# Altium PCB SAMD21_8X8_Layout.PcbDoc
Units mm, origin at the board's own origin, x right, y up, seen from the top; angles counter-clockwise.
Board outline 152.4 x 146.05 mm, 2 copper layers (Top Layer, Bottom Layer); 23 components, 31 nets, 146 pads, 53 vias.
Unrouted connection lines stored in the file: 27.
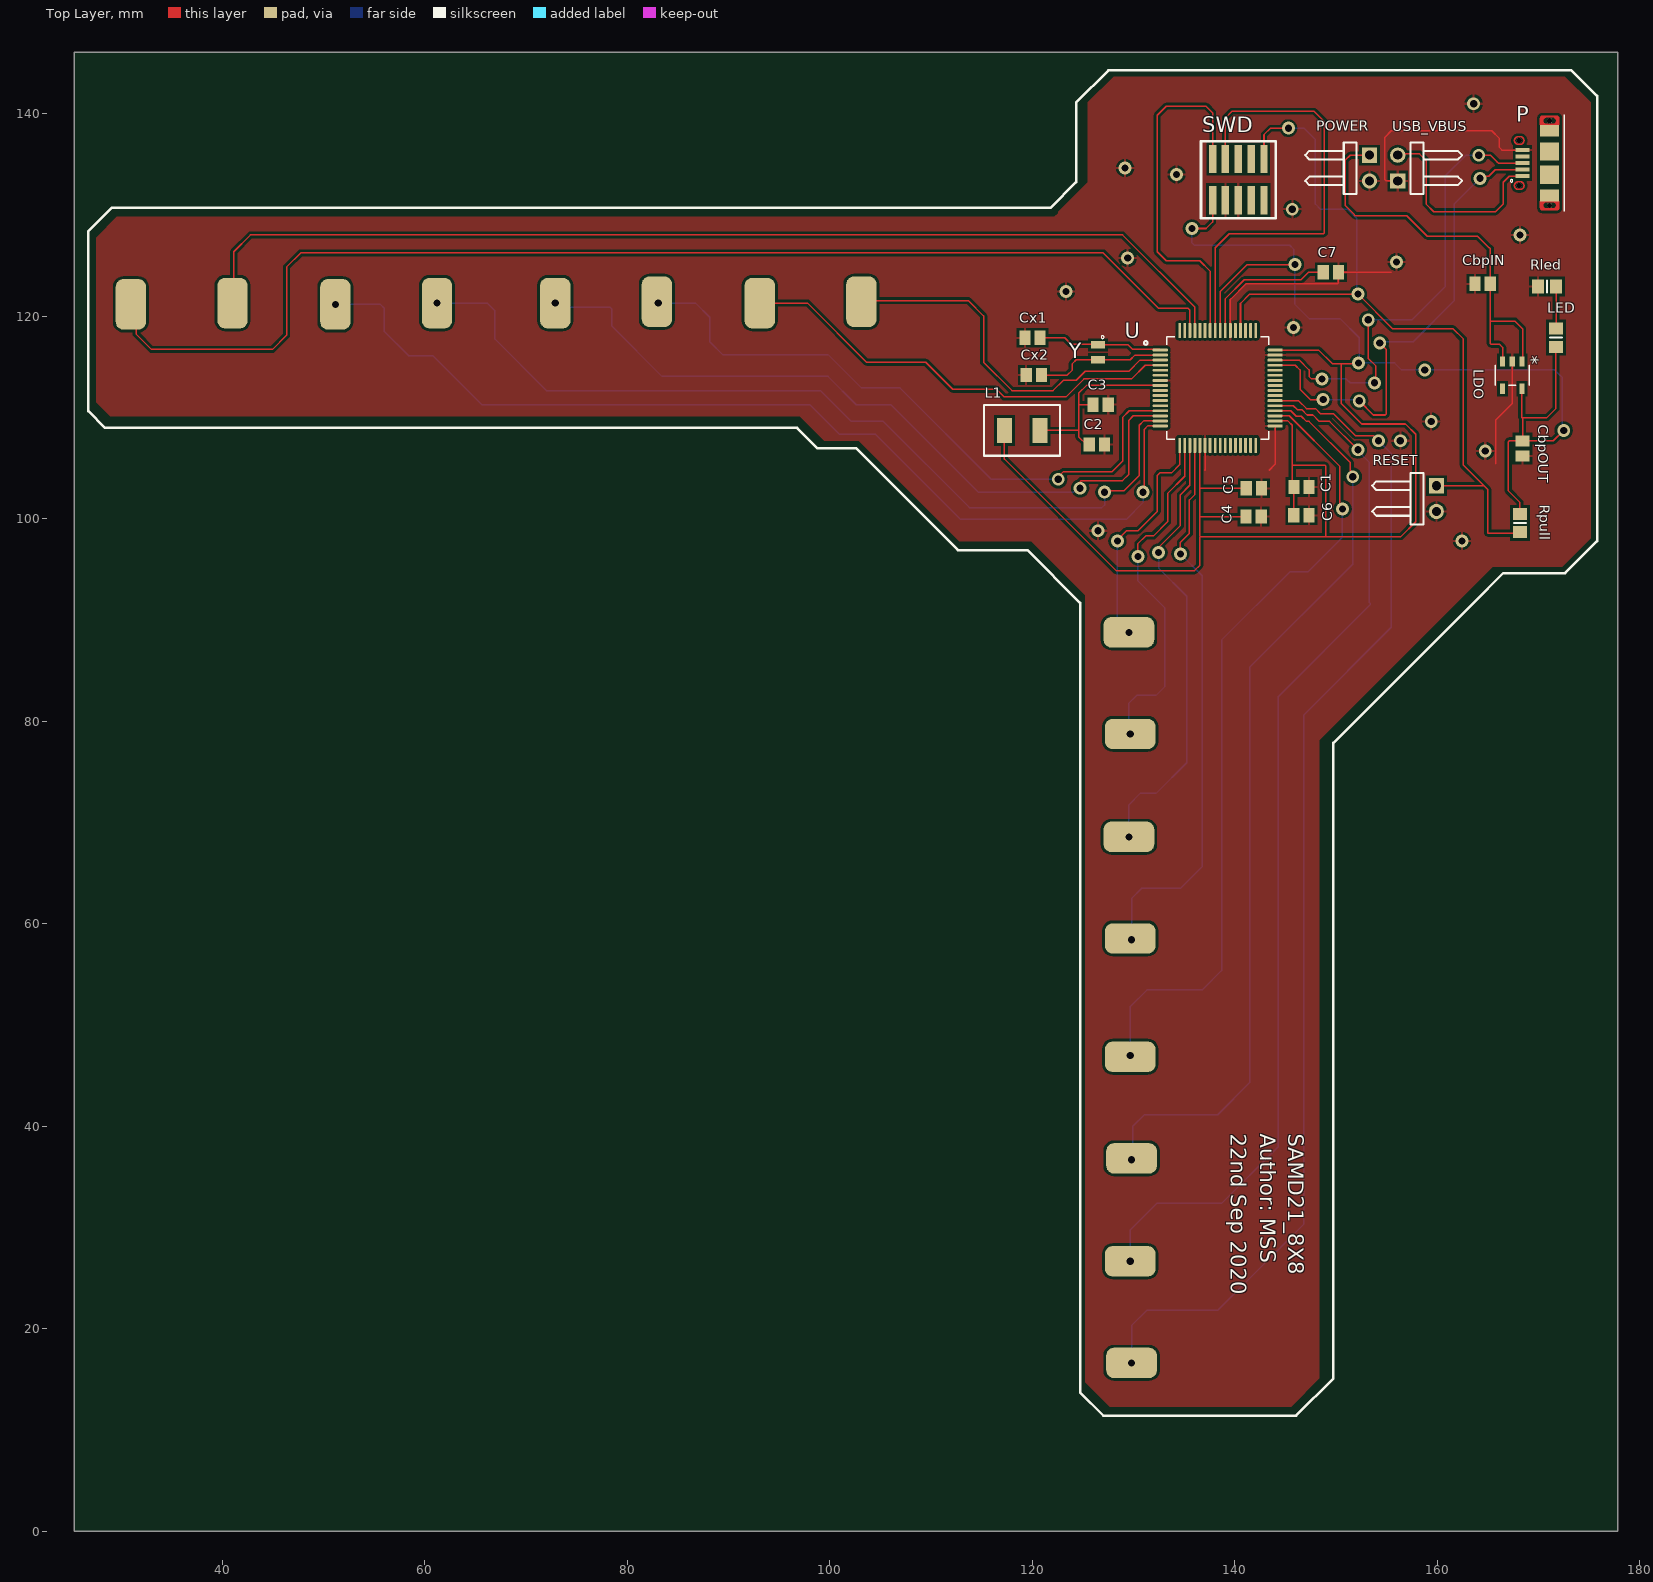
[diagram p0: Top Layer view]
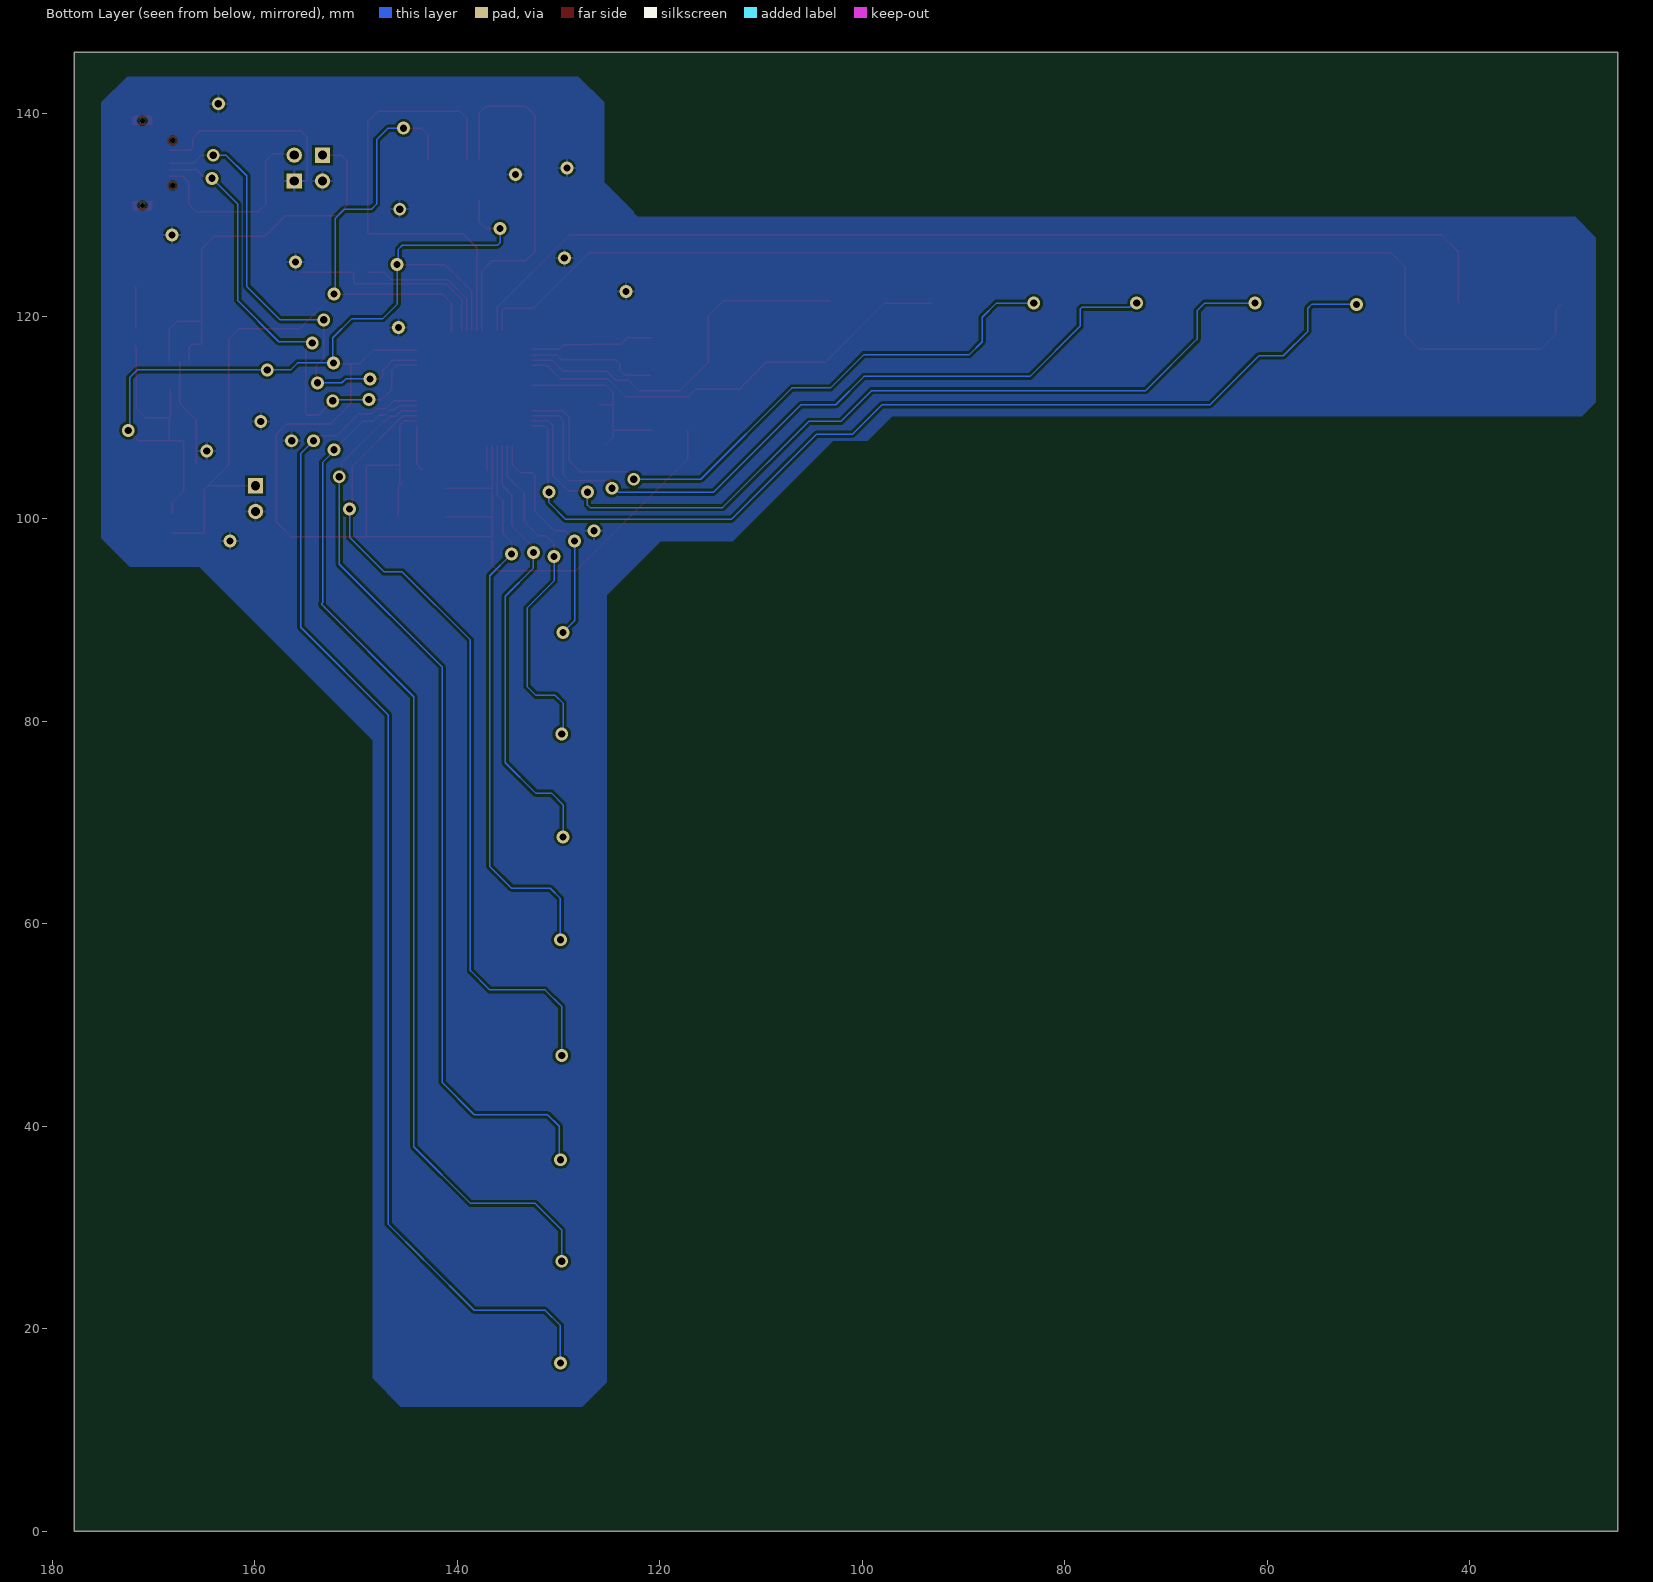
[diagram p1: Bottom Layer view, seen from below]

## Layer stack, top to bottom
Top Solder: solder mask 0.0102, Solder Resist, Dk 3.5
Top Layer: signal copper 0.0356
Dielectric 1: dielectric 0.32, FR-4, Dk 4.8
Bottom Layer: signal copper 0.0356
Bottom Solder: solder mask 0.0102, Solder Resist, Dk 3.5

## Board outline
25.4,0 177.8,0 177.8,146.05 25.4,146.05

## Design rules (kind name [scope] priority, off if disabled: settings)
Clearance [All] p1: gap=0.254 ignorepadtopadclearanceinfootprint=FALSE except(0: Arc-Hole Track-Hole SMDPad-Hole THPad-Hole Via-Hole Fill-Hole Poly-Hole Region-Hole Text-Hole)
PolygonConnect [All] p1: connectstyle=Relief reliefconductorwidth=0.254 reliefentries=4 polygonreliefangle="90 Angle" airgapwidth=0.254
RoomDefinition SAMD21_8X8_schematic [InComponentClass('SAMD21_8X8_schematic')] p1: confinementstyle=ConfineIn formatcopy=TRUE lockcomponents=FALSE outline 26.035,1.27 177.038,1.27 177.038,145.415 26.035,145.415
RoutingVias [All] p1: holewidth=0.711 width=1.27 viastyle="Through Hole" minholewidth=0.711 minwidth=1.27 maxholewidth=0.711 maxwidth=1.27
SolderMaskExpansion [All] p1: expansion=0.102 istentingtop=FALSE
Width [All] p1: maxlimit=0.254 minlimit=0.1 preferedwidth=0.254
30 further rules are at their usual default settings.

## Components (designator, comment, footprint, x,y, rotation, side; value= is the part's Value field where it differs from the comment)
C1 "Cap Pol3" C0805 146.57,103.124 r0 top value=10uF
C2 "Cap Pol3" C0805 126.365,107.315 r0 top value=100nF
C3 "Cap Pol3" C0805 126.746,111.252 r0 top value=10uF
C4 "Cap Pol3" C0805 141.847,100.203 r0 top value=100nF
C5 "Cap Pol3" C0805 141.871,102.997 r0 top value=100nF
C6 "Cap Pol3" C0805 146.558,100.33 r0 top value=100nF
C7 "Cap Pol3" C0805 149.479,124.333 r0 top value=1uF
CbpIN "Cap Pol3" C0805 164.465,123.19 r180 top value=1uF
CbpOUT "Cap Pol3" C0805 168.402,106.934 r270 top value=1uF
Cx1 "Cap Pol3" C0805 120.015,117.856 r180 top value=25pF
Cx2 "Cap Pol3" C0805 120.142,114.173 r180 top value=25pF
L1 "SRP4012TA-100M" Inductor 118.999,108.712 r180 top
LDO "AP2112K-3.3TRG1" SOT_RG1_DIO 167.386,114.173 r270 top
LED "Res Thermal" 6-0805_N 171.704,117.867 r90 top
P "0475890001" MOLEX_0475890001 171.077,135.113 r90 top
POWER "Header 2H" HDR1X2H 153.289,135.89 r270 top
RESET "Header 2H" HDR1X2H 159.893,103.251 r270 top
Rled "Res Thermal" 6-0805_N 170.815,122.936 r180 top
Rpull "Res Thermal" 6-0805_N 168.148,99.568 r270 top
SWD "FTSH-105-01-XXX-DV-K" FTSH-105-01-XXX-DV-K 140.335,133.477 r0 top
U "ATSAMD21J18A-AU" QFP80P1600X1600X120-64N 138.303,112.903 r0 top
USB_VBUS "Header 2H" HDR1X2H 156.083,133.35 r90 top
Y "ABS06-32.768KHZ-T" XTAL_ABS06-32.768KHZ-T 126.492,116.427 r270 top

## Footprints (in the part's own frame and the unit in brackets; to place one, negate y for a bottom-side part, rotate by r counter-clockwise, add the part's x,y. Pads: shape width x height; smd on the part's side, far side on the other; paste and mask are expansions set on the pad)
6-0805_N [mm] "Chip Resistor, Body 2.0x1.2mm, IPC Medium Density"
  rect 1.2x1.4 smd: 1(-0.9,0) 2(0.9,0)
  silkscreen extent 0,-0.6 0,0.6, body extent -1.07,-0.7 1.07,0.7, height 0.7
C0805 [mm] "Chip Capacitor, Body 2.0x1.3mm, IPC High Density"
  rect 1.1x1.4 smd: 1(-0.75,0) 2(0.75,0)
  body extent -1.1,-0.72 1.1,0.72, height 1.4
FTSH-105-01-XXX-DV-K [mil]
  rect 29x110 smd mask+2: 1(-100,-80) 2(-100,80) 3(-50,-80) 4(-50,80) 5(0,-80) 6(0,80) 7(50,-80) 8(50,80) 9(100,-80) 10(100,80)
  silkscreen extent -145,-150 145,150
HDR1X2H [mm] "Connector; Header; 2 Position; Right Angle"
  rect 1.5x1.5 hole 0.9: 1(0,0)
  round 1.5 hole 0.9: 2(2.54,0)
  silkscreen extent -1.27,-6.35 3.81,-1.27
Inductor [mm]
  rect 1.5x2.5 smd: 1(-1.75,0) 2(1.75,0)
  silkscreen extent -3.75,-2.5 3.75,2.5
MOLEX_0475890001 [mm]
  rect 0.4x1.35 smd: 1(-1.3,2.675) 2(-0.65,2.675) 3(0,2.675) 4(0.65,2.675) 5(1.3,2.675)
  rect 1.175x1.9 smd: 6(-3.187,0) 9(3.187,0)
  rect 1.8x1.9 smd: 7(-1.15,0) 8(1.15,0)
  round 0.5 hole 0.5 unplated: ""(-4.175,0) ""(-2.225,3) ""(2.225,3) ""(4.175,0)
  Top Layer region: 3.875,0.35 3.875,-0.35 3.875,-0.95 3.775,-0.95 3.775,0.95 3.875,0.95
  Top Layer region: 187 vertices and 0 holes, not listed, extent 3.875,-0.95 4.675,0.95
  Top Layer region: -3.775,-0.95 -3.875,-0.95 -3.875,-0.35 -3.875,0.35 -3.875,0.95 -3.775,0.95
  Top Layer region: 2.65,2.9 2.649,2.878 2.648,2.856 2.645,2.834 2.641,2.812 2.636,2.79 2.629,2.769 2.622,2.748 2.613,2.727 2.604,2.707 2.593,2.688 2.581,2.669 2.569,2.65 2.555,2.633 2.541,2.616 2.526,2.599 2.509,2.584 2.492,2.57 2.475,2.556 2.456,2.544 2.438,2.532 2.418,2.521 2.398,2.512 2.377,2.503 2.356,2.496 2.335,2.489 2.313,2.484 2.291,2.48 2.269,2.477 2.247,2.476 2.225,2.475 2.203,2.476 2.181,2.477 2.159,2.48 2.137,2.484 2.115,2.489 2.094,2.496 2.073,2.503 2.052,2.512 2.032,2.521 2.013,2.532 1.994,2.544 1.975,2.556 1.958,2.57 1.941,2.584 1.924,2.599 1.909,2.616 1.895,2.633 1.881,2.65 1.869,2.669 1.857,2.688 1.846,2.707 1.837,2.727 1.828,2.748 1.821,2.769 1.814,2.79 1.809,2.812 1.805,2.834 1.802,2.856 1.801,2.878 1.8,2.9 1.8,3 1.9,3 1.9,2.9 1.9,2.883 1.902,2.866 1.904,2.849 1.907,2.832 1.911,2.816 1.916,2.8 1.922,2.784 1.928,2.768 1.935,2.752 1.944,2.738 1.952,2.723 1.962,2.709 1.972,2.695 1.983,2.683 1.995,2.67 2.008,2.658 2.02,2.647 2.034,2.637 2.048,2.627 2.063,2.619 2.077,2.61 2.093,2.603 2.109,2.597 2.125,2.591 2.141,2.586 2.157,2.582 2.174,2.579 2.191,2.577 2.208,2.575 2.225,2.575 2.242,2.575 2.259,2.577 2.276,2.579 2.293,2.582 2.309,2.586 2.325,2.591 2.341,2.597 2.357,2.603 2.373,2.61 2.388,2.619 2.402,2.627 2.416,2.637 2.43,2.647 2.442,2.658 2.455,2.67 2.467,2.683 2.478,2.695 2.488,2.709 2.498,2.723 2.506,2.738 2.515,2.752 2.522,2.768 2.528,2.784 2.534,2.8 2.539,2.816 2.543,2.832 2.546,2.849 2.548,2.866 2.55,2.883 2.55,2.9 2.55,3 2.65,3
  Top Layer region: 2.247,3.524 2.269,3.523 2.291,3.52 2.313,3.516 2.335,3.511 2.356,3.504 2.377,3.497 2.398,3.488 2.418,3.479 2.438,3.468 2.456,3.456 2.475,3.444 2.492,3.43 2.509,3.416 2.526,3.401 2.541,3.384 2.555,3.367 2.569,3.35 2.581,3.331 2.593,3.313 2.604,3.293 2.613,3.273 2.622,3.252 2.629,3.231 2.636,3.21 2.641,3.188 2.645,3.166 2.648,3.144 2.649,3.122 2.65,3.1 2.65,3 2.55,3 2.55,3.1 2.55,3.117 2.548,3.134 2.546,3.151 2.543,3.168 2.539,3.184 2.534,3.2 2.528,3.216 2.522,3.232 2.515,3.248 2.506,3.263 2.498,3.277 2.488,3.291 2.478,3.305 2.467,3.317 2.455,3.33 2.442,3.342 2.43,3.353 2.416,3.363 2.402,3.373 2.388,3.381 2.373,3.39 2.357,3.397 2.341,3.403 2.325,3.409 2.309,3.414 2.293,3.418 2.276,3.421 2.259,3.423 2.242,3.425 2.225,3.425 2.208,3.425 2.191,3.423 2.174,3.421 2.157,3.418 2.141,3.414 2.125,3.409 2.109,3.403 2.093,3.397 2.077,3.39 2.063,3.381 2.048,3.373 2.034,3.363 2.02,3.353 2.008,3.342 1.995,3.33 1.983,3.317 1.972,3.305 1.962,3.291 1.952,3.277 1.944,3.263 1.935,3.248 1.928,3.232 1.922,3.216 1.916,3.2 1.911,3.184 1.907,3.168 1.904,3.151 1.902,3.134 1.9,3.117 1.9,3.1 1.9,3 1.8,3 1.8,3.1 1.801,3.122 1.802,3.144 1.805,3.166 1.809,3.188 1.814,3.21 1.821,3.231 1.828,3.252 1.837,3.273 1.846,3.293 1.857,3.313 1.869,3.331 1.881,3.35 1.895,3.367 1.909,3.384 1.924,3.401 1.941,3.416 1.958,3.43 1.975,3.444 1.994,3.456 2.013,3.468 2.032,3.479 2.052,3.488 2.073,3.497 2.094,3.504 2.115,3.511 2.137,3.516 2.159,3.52 2.181,3.523 2.203,3.524 2.225,3.525
  Top Layer region: -1.8,2.9 -1.801,2.878 -1.802,2.856 -1.805,2.834 -1.809,2.812 -1.814,2.79 -1.821,2.769 -1.828,2.748 -1.837,2.727 -1.846,2.707 -1.857,2.688 -1.869,2.669 -1.881,2.65 -1.895,2.633 -1.909,2.616 -1.924,2.599 -1.941,2.584 -1.958,2.57 -1.975,2.556 -1.994,2.544 -2.013,2.532 -2.032,2.521 -2.052,2.512 -2.073,2.503 -2.094,2.496 -2.115,2.489 -2.137,2.484 -2.159,2.48 -2.181,2.477 -2.203,2.476 -2.225,2.475 -2.247,2.476 -2.269,2.477 -2.291,2.48 -2.313,2.484 -2.335,2.489 -2.356,2.496 -2.377,2.503 -2.398,2.512 -2.418,2.521 -2.438,2.532 -2.456,2.544 -2.475,2.556 -2.492,2.57 -2.509,2.584 -2.526,2.599 -2.541,2.616 -2.555,2.633 -2.569,2.65 -2.581,2.669 -2.593,2.688 -2.604,2.707 -2.613,2.727 -2.622,2.748 -2.629,2.769 -2.636,2.79 -2.641,2.812 -2.645,2.834 -2.648,2.856 -2.649,2.878 -2.65,2.9 -2.65,3 -2.55,3 -2.55,2.9 -2.55,2.883 -2.548,2.866 -2.546,2.849 -2.543,2.832 -2.539,2.816 -2.534,2.8 -2.528,2.784 -2.522,2.768 -2.515,2.752 -2.506,2.738 -2.498,2.723 -2.488,2.709 -2.478,2.695 -2.467,2.683 -2.455,2.67 -2.442,2.658 -2.43,2.647 -2.416,2.637 -2.402,2.627 -2.388,2.619 -2.373,2.61 -2.357,2.603 -2.341,2.597 -2.325,2.591 -2.309,2.586 -2.293,2.582 -2.276,2.579 -2.259,2.577 -2.242,2.575 -2.225,2.575 -2.208,2.575 -2.191,2.577 -2.174,2.579 -2.157,2.582 -2.141,2.586 -2.125,2.591 -2.109,2.597 -2.093,2.603 -2.077,2.61 -2.063,2.619 -2.048,2.627 -2.034,2.637 -2.02,2.647 -2.008,2.658 -1.995,2.67 -1.983,2.683 -1.972,2.695 -1.962,2.709 -1.952,2.723 -1.944,2.738 -1.935,2.752 -1.928,2.768 -1.922,2.784 -1.916,2.8 -1.911,2.816 -1.907,2.832 -1.904,2.849 -1.902,2.866 -1.9,2.883 -1.9,2.9 -1.9,3 -1.8,3
  Top Layer region: -2.203,3.524 -2.181,3.523 -2.159,3.52 -2.137,3.516 -2.115,3.511 -2.094,3.504 -2.073,3.497 -2.052,3.488 -2.032,3.479 -2.013,3.468 -1.994,3.456 -1.975,3.444 -1.958,3.43 -1.941,3.416 -1.924,3.401 -1.909,3.384 -1.895,3.367 -1.881,3.35 -1.869,3.331 -1.857,3.313 -1.846,3.293 -1.837,3.273 -1.828,3.252 -1.821,3.231 -1.814,3.21 -1.809,3.188 -1.805,3.166 -1.802,3.144 -1.801,3.122 -1.8,3.1 -1.8,3 -1.9,3 -1.9,3.1 -1.9,3.117 -1.902,3.134 -1.904,3.151 -1.907,3.168 -1.911,3.184 -1.916,3.2 -1.922,3.216 -1.928,3.232 -1.935,3.248 -1.944,3.263 -1.952,3.277 -1.962,3.291 -1.972,3.305 -1.983,3.317 -1.995,3.33 -2.008,3.342 -2.02,3.353 -2.034,3.363 -2.048,3.373 -2.063,3.381 -2.077,3.39 -2.093,3.397 -2.109,3.403 -2.125,3.409 -2.141,3.414 -2.157,3.418 -2.174,3.421 -2.191,3.423 -2.208,3.425 -2.225,3.425 -2.242,3.425 -2.259,3.423 -2.276,3.421 -2.293,3.418 -2.309,3.414 -2.325,3.409 -2.341,3.403 -2.357,3.397 -2.373,3.39 -2.388,3.381 -2.402,3.373 -2.416,3.363 -2.43,3.353 -2.442,3.342 -2.455,3.33 -2.467,3.317 -2.478,3.305 -2.488,3.291 -2.498,3.277 -2.506,3.263 -2.515,3.248 -2.522,3.232 -2.528,3.216 -2.534,3.2 -2.539,3.184 -2.543,3.168 -2.546,3.151 -2.548,3.134 -2.55,3.117 -2.55,3.1 -2.55,3 -2.65,3 -2.65,3.1 -2.649,3.122 -2.648,3.144 -2.645,3.166 -2.641,3.188 -2.636,3.21 -2.629,3.231 -2.622,3.252 -2.613,3.273 -2.604,3.293 -2.593,3.313 -2.581,3.331 -2.569,3.35 -2.555,3.367 -2.541,3.384 -2.526,3.401 -2.509,3.416 -2.492,3.43 -2.475,3.444 -2.456,3.456 -2.438,3.468 -2.418,3.479 -2.398,3.488 -2.377,3.497 -2.356,3.504 -2.335,3.511 -2.313,3.516 -2.291,3.52 -2.269,3.523 -2.247,3.524 -2.225,3.525
  Top Layer region: 187 vertices and 0 holes, not listed, extent -4.675,-0.95 -3.875,0.95
  silkscreen extent -4.75,-1.45 4.75,3.88
QFP80P1600X1600X120-64N [mm]
  rrect50% 1.49x0.28 smd: 1(-5.67,3.75) 2(-5.67,3.25) 3(-5.67,2.75) 4(-5.67,2.25) 5(-5.67,1.75) 6(-5.67,1.25) 7(-5.67,0.75) 8(-5.67,0.25) 9(-5.67,-0.25) 10(-5.67,-0.75) 11(-5.67,-1.25) 12(-5.67,-1.75) 13(-5.67,-2.25) 14(-5.67,-2.75) 15(-5.67,-3.25) 16(-5.67,-3.75) 33(5.67,-3.75) 34(5.67,-3.25) 35(5.67,-2.75) 36(5.67,-2.25) 37(5.67,-1.75) 38(5.67,-1.25) 39(5.67,-0.75) 40(5.67,-0.25) 41(5.67,0.25) 42(5.67,0.75) 43(5.67,1.25) 44(5.67,1.75) 45(5.67,2.25) 46(5.67,2.75) 47(5.67,3.25) 48(5.67,3.75)
  rrect50% 0.28x1.49 smd: 17(-3.75,-5.67) 18(-3.25,-5.67) 19(-2.75,-5.67) 20(-2.25,-5.67) 21(-1.75,-5.67) 22(-1.25,-5.67) 23(-0.75,-5.67) 24(-0.25,-5.67) 25(0.25,-5.67) 26(0.75,-5.67) 27(1.25,-5.67) 28(1.75,-5.67) 29(2.25,-5.67) 30(2.75,-5.67) 31(3.25,-5.67) 32(3.75,-5.67) 49(3.75,5.67) 50(3.25,5.67) 51(2.75,5.67) 52(2.25,5.67) 53(1.75,5.67) 54(1.25,5.67) 55(0.75,5.67) 56(0.25,5.67) 57(-0.25,5.67) 58(-0.75,5.67) 59(-1.25,5.67) 60(-1.75,5.67) 61(-2.25,5.67) 62(-2.75,5.67) 63(-3.25,5.67) 64(-3.75,5.67)
  silkscreen extent -7.28,-5.05 5.05,5.05
SOT_RG1_DIO [mil]
  rect 39.5x20 smd paste+0 mask+0: 1(-53.25,37.4) 2(-53.25,0) 3(-53.25,-37.4) 4(53.25,-37.4) 5(53.25,37.4)
  silkscreen extent -39,-66 39,66, body extent 0,0 10,10, height 10
XTAL_ABS06-32.768KHZ-T [mm]
  rect 0.75x1.4 smd: 1(-0.73,0) 2(0.73,0)
  silkscreen extent -1.64,0.31 -1.36,0.59

## Part data
C1 C2 C3 C4 C5 C6 C7 CbpIN CbpOUT Cx1 Cx2: "Polarized Capacitor (Surface Mount)", LatestRevisionDate=29-May-2009, LatestRevisionNote="IPC-7351 Footprint Added.", PackageDescription="Chip Capacitor", PackageReference=C0805, Published=8-Jun-2000, Publisher="Altium Limited"
L1: "Inductor"
LDO: "No Description Available", Built_By=EMA_Matt, Copyright="Copyright (C) 2018 Accelerated Designs. All rights reserved", Manufacturer_Part_Number=AP2112K-3.3TRG1, RefDes=RefDes, SourceLibrary=Diodes_Inc_2019-12-05, Type=DEV, Vendor="Diodes Inc"
LED Rled Rpull: "Thermistor", Code_IPC=RESC2012, LatestRevisionDate=29-May-2009, LatestRevisionNote="IPC-7351 Footprint Added.", PackageDescription="Chip Resistor 0805 Case Size", PackageReference=6-0805, PackageVersion=Mar-2003, Published=24-Mar-1999, Publisher="Altium Limited"
P: "USB - micro AB Receptacle Connector 5 Position Surface Mount, Right Angle; Through Hole", Package=None, Digi-Key_Part_Number=WM17143CT-ND, Digi-Key_Purchase_URL=https://www.digikey.com/product-detail/en/molex/0475890001/WM17143CT-ND/1832255?utm_source=snapeda&utm_medium=aggregator&utm_campaign=symbol, MF=Molex, MP=0475890001, SnapEDA_Link=https://www.snapeda.com/parts/0475890001/Molex/view-part/379420/?ref=snap
POWER RESET USB_VBUS: "Header, 2-Pin, Right Angle", LatestRevisionDate=17-Jul-2002, LatestRevisionNote="Re-released for DXP Platform.", Publisher="Altium Limited"
SWD: "TERMINAL STRIP, .050\"(1.27mm) PITCH, 10 PINS, KEYED", MANUFACTURER=SAMTEC, CREATED="November 30, 2016 - Wendy Xin", PCB DECAL=FTSH-105-01-XXX-DV-K
U: "ARMÂ® CortexÂ®-M0+ SAM D21J Microcontroller IC 32-Bit 48MHz 256KB _256K x 8_ FLASH 64-TQFP _10x10_", Package="TQFP-64 Microchip", Availability=Unavailable, MF=Microchip, MP=ATSAMD21J18A-AU, Price=None, SnapEDA_Link=https://www.snapeda.com/parts/ATSAMD21J18A-AU/Microchip/view-part/588919/?ref=snap
Y: "32.768kHz Â±20ppm Crystal 12.5pF 90 kOhms 2-SMD, No Lead", Package="SMD-2 Abracon", Availability=Unavailable, DigiKey-Purchase-URL=https://snapeda.com/shop?store=DigiKey&id=108994, MF=Abracon, MP=ABS06-32.768KHZ-T, Price=None, SnapEDA_Link=https://www.snapeda.com/parts/ABS06-32.768KHZ-T/Abracon%20LLC/view-part/108994/?ref=snap

## Free pads (board coordinates)
  rrect50% 5x3 smd: X0(129.54,88.773) X1(129.667,78.74) X2(129.54,68.58) X3(129.667,58.547) X4(129.667,46.863) X5(129.794,36.83) X6(129.667,26.67) X7(129.794,16.637)
  rrect50% 3x5 smd: Y0(103.124,121.412) Y1(93.091,121.285) Y2(82.931,121.412) Y3(72.898,121.285) Y4(61.214,121.285) Y5(51.181,121.158) Y6(41.021,121.285) Y7(30.988,121.158)

## Via types
v1: diameter 1.27, hole 0.711, Top Layer to Bottom Layer, 53 vias

## Nets (pads, with @x,y where several pads share a name; then routed paths per layer and width w, separated by ;. In a path a pad name is that pad's centre, name@x,y a point inside that pad or via, vN(x,y) a via of type N, cw(c..) or ccw(c..) an arc to the next point about the centre after c; other vN are vias at no path point)
GND: C1.2 C2.2 C3.2 C4.2 C5.2 C6.2 C7.2 CbpIN.2 CbpOUT.2 Cx1.2 Cx2.2 LDO.2 P.5 POWER.2 RESET.2 Rled.2 SWD.3 SWD.5 U.7 U.22 U.33 U.47 U.54 USB_VBUS.1 | length 59.3
  Top Layer w0.15: 137.033,104.775 137.053,104.795 U.22 ; U.54 139.553,121.646 141.097,123.19 150.141,123.19 150.229,123.278 C7.2 155.448,124.333 ; 143.383,104.775 143.973,105.365 U.33 ; USB_VBUS.1 154.94,133.35 154.813,133.477 154.813,137.668 155.448,138.303 165.354,138.303 166.116,137.541 166.116,136.652 166.37,136.398 168.387,136.398 P.5 ; 165.735,105.41 165.735,109.728 167.386,111.379 LDO.2
  other v1: 162.433,97.79 126.492,98.806 164.719,106.68 156.337,107.696 159.385,109.601 145.796,118.872 123.317,122.428 155.956,125.349 129.413,125.73 168.148,128.016 145.669,130.556 134.239,133.985 129.159,134.62 163.576,140.97
NetC2_1: C2.1 C3.1 L1.1 U.8 | length 19
  Top Layer w0.15: L1.1 124.587,108.712 ; C2.1@125.349,107.315 124.587,108.077 124.587,108.712 ; C3.1 124.587,111.252 ; U.8 132.629,113.157 125.349,113.157 124.587,112.395 124.587,111.252 ; 124.587,108.712 124.587,111.252
NetC7_1: C7.1 U.55 | length 13.9
  Top Layer w0.15: U.55 139.065,118.585 139.065,121.729 140.93,123.594 146.54,123.594 147.279,124.333 C7.1
NetCbpIN_1: CbpIN.1 LDO.1 LDO.3 POWER.1 | length 42.1
  Top Layer w0.15: POWER.1 151.384,135.89 150.876,135.382 150.876,130.937 151.765,130.048 151.765,130.009 151.853,129.921 156.972,129.921 159.004,127.889 163.957,127.889 165.1,126.746 165.139,126.746 165.227,126.658 165.227,123.202 CbpIN.1 165.215,119.507 ; LDO.3 166.436,116.901 166.116,117.221 165.303,117.221 165.215,117.309 165.215,119.507 ; LDO.1 168.402,115.592 168.402,118.745 167.64,119.507 165.215,119.507
NetCx1_1: Cx1.1 U.1 Y.1 | length 12.4
  Top Layer w0.15: Cx1.1 123.19,117.856 123.825,117.221 126.428,117.221 Y.1 129.477,117.157 129.921,116.713 132.573,116.713 U.1
NetCx2_1: Cx2.1 U.2 Y.2 | length 12.9
  Top Layer w0.15: Cx2.1 123.444,114.173 123.952,114.681 123.952,115.316 124.333,115.697 Y.2 129.667,115.697 130.123,116.153 U.2
NetLED_2: LED.2 Rled.1 | length 4.2
  Top Layer w0.15: LED.2 171.715,118.778 Rled.1
NetP_1: P.1 USB_VBUS.2 | length 20
  Top Layer w0.15: USB_VBUS.2 156.21,136.017 158.242,136.017 158.877,135.382 158.877,131.064 159.639,130.302 165.735,130.302 166.497,131.064 166.497,133.223 167.087,133.813 P.1
NetP_2: P.2 U.45 | length 48.2
  Top Layer w0.15: U.45 145.959,115.153 146.431,114.681 146.431,112.776 147.447,111.76 v1(148.717,111.76) ; v1@152.273,111.887 v1(152.273,111.633) 153.67,110.236 154.852,110.236 154.94,110.324 154.94,116.713 v1(154.305,117.348) ; v1(164.211,133.604) 164.425,133.818 165.06,133.818 165.705,134.463 P.2
  Bottom Layer w0.15: v1(148.717,111.76) 152.146,111.76 v1(152.273,111.633) ; v1@154.559,117.475 157.607,117.475 161.671,121.539 161.671,131.064 v1(164.211,133.604)
NetP_3: P.3 U.46 | length 46.4
  Top Layer w0.15: U.46 146.348,115.653 147.32,114.681 147.32,114.046 147.574,113.792 v1(148.59,113.792) ; v1(153.162,119.634) 153.162,115.824 153.924,115.062 153.924,113.538 v1(153.797,113.411) ; v1(164.084,135.89) 165.227,135.89 165.909,135.208 165.909,135.201 165.996,135.113 P.3
  Bottom Layer w0.15: v1(148.59,113.792) 151.003,113.792 151.384,113.411 v1(153.797,113.411) ; v1(153.162,119.634) 157.48,119.634 160.782,122.936 160.782,133.858 162.814,135.89 v1(164.084,135.89)
NetRESET_1: RESET.1 Rpull.2 SWD.10 U.52 | length 81.8
  Top Layer w0.15: U.52 140.553,121.249 141.478,122.174 v1(152.146,122.174) 155.575,118.745 161.544,118.745 162.56,117.729 162.56,105.283 164.592,103.251 ; SWD.10 142.875,137.922 143.51,138.557 v1(145.288,138.557) ; RESET.1 164.592,103.251 ; Rpull.2 168.032,98.552 164.973,98.552 164.973,102.87 164.592,103.251
  Bottom Layer w0.15: v1(145.288,138.557) 146.812,138.557 147.955,137.414 147.955,131.064 148.463,130.556 151.13,130.556 152.019,129.667 152.019,122.301 v1(152.146,122.174)
NetSWD_2: SWD.2 U.58 | length 36
  Top Layer w0.15: U.58 137.553,124.448 136.525,125.476 133.223,125.476 132.334,126.365 132.334,139.827 133.223,140.716 137.16,140.716 137.795,140.081 SWD.2
NetSWD_4: SWD.4 U.57 | length 45.1
  Top Layer w0.15: U.57 138.053,126.75 139.446,128.143 148.756,128.143 148.844,128.231 148.844,139.192 147.828,140.208 139.7,140.208 139.065,139.573 SWD.4
NetU_3: pad.Y0 U.3 | length 37.2
  Top Layer w0.15: pad.Y0 103.251,121.539 113.665,121.539 115.189,120.015 115.189,115.443 117.983,112.649 122.047,112.649 123.063,113.665 124.333,113.665 125.222,114.554 129.54,114.554 130.639,115.653 U.3 U.3@132.611,115.675
NetU_4: pad.Y1 U.4 | length 44.7
  Top Layer w0.15: pad.Y1 97.79,121.285 103.632,115.443 109.474,115.443 112.141,112.776 116.459,112.776 117.221,112.014 123.317,112.014 125.095,113.792 129.794,113.792 131.155,115.153 U.4
NetU_13: pad.Y2 U.13 | length 63.8
  Top Layer w0.15: v1@122.682,103.759 122.682,104.267 123.063,104.648 127.889,104.648 128.905,105.664 128.905,109.982 129.576,110.653 U.13
  Bottom Layer w0.15: v1(83.058,121.285) 86.741,121.285 88.138,119.888 88.138,117.475 89.408,116.205 99.822,116.205 103.124,112.903 106.934,112.903 115.951,103.886 v1(122.555,103.886)
NetU_14: pad.Y3 U.14 | length 75.1
  Top Layer w0.15: v1(124.714,102.997) 124.714,103.671 124.802,103.759 128.905,103.759 129.54,104.394 129.54,109.728 129.965,110.153 U.14
  Bottom Layer w0.15: v1(72.898,121.285) 73.201,121.285 73.628,120.859 78.317,120.859 78.486,120.689 78.486,118.999 83.439,114.046 99.822,114.046 102.616,111.252 106.045,111.252 114.681,102.616 124.066,102.616 124.447,102.997 v1(124.714,102.997)
NetU_15: pad.Y4 U.15 | length 89
  Top Layer w0.15: v1@127,102.235 127,102.489 v1(127.127,102.616) 127.254,102.743 129.032,102.743 130.556,104.267 130.556,109.22 130.989,109.653 U.15
  Bottom Layer w0.15: v1(61.214,121.285) 66.167,121.285 66.929,120.523 66.929,117.729 72.009,112.649 99.06,112.649 102.108,109.601 105.283,109.601 113.792,101.092 126.873,101.092 127.127,101.346 v1(127.127,102.616)
NetU_16: pad.Y5 U.16 | length 100.2
  Top Layer w0.15: v1@130.683,102.108 131.064,102.489 131.064,108.839 131.378,109.153 U.16
  Bottom Layer w0.15: v1(51.181,121.158) 55.626,121.158 56.007,120.777 56.007,118.491 58.42,116.078 60.833,116.078 65.659,111.252 98.044,111.252 100.965,108.331 104.521,108.331 109.41,103.442 112.903,99.949 129.286,99.949 130.937,101.6 v1(130.937,102.616)
NetU_17: pad.X0 U.17 | length 23.1
  Top Layer w0.15: v1@128.27,97.536 128.397,97.663 v1(128.397,97.79) 128.397,97.917 129.286,98.806 130.429,98.806 132.334,100.711 132.334,104.267 132.588,104.521 133.731,104.521 134.553,105.343 U.17
  Bottom Layer w0.15: v1(128.397,97.79) 128.397,89.916 v1(129.54,88.773)
NetU_18: pad.X1 U.18 | length 34.6
  Top Layer w0.15: v1(130.429,96.266) 130.429,97.536 131.191,98.298 131.953,98.298 133.35,99.695 133.35,102.489 135.053,104.192 U.18
  Bottom Layer w0.15: v1(129.667,78.74) 129.54,78.867 129.54,81.788 130.302,82.55 132.207,82.55 133.096,83.439 133.096,91.186 130.429,93.853 v1(130.429,96.266)
NetU_19: pad.X2 U.19 | length 44.4
  Top Layer w0.15: v1(132.461,96.647) 132.461,97.155 134.62,99.314 134.62,102.362 135.553,103.295 U.19
  Bottom Layer w0.15: v1(129.54,68.58) 129.54,71.755 130.683,72.898 132.246,72.898 135.255,75.907 135.255,92.329 132.461,95.123 v1(132.461,96.647)
NetU_20: pad.X3 U.20 | length 55.4
  Top Layer w0.15: v1(134.62,96.52) 134.62,97.663 135.509,98.552 135.509,101.854 136.053,102.398 U.20
  Bottom Layer w0.15: v1(129.794,58.42) 129.794,62.484 130.81,63.5 134.62,63.5 136.779,65.659 136.779,94.361 v1(134.62,96.52)
NetU_35: pad.X4 U.35 | length 79.4
  Top Layer w0.15: U.35 145.371,110.153 150.368,105.156 v1@150.368,101.092
  Bottom Layer w0.15: v1(129.667,46.99) 129.667,51.816 131.318,53.467 136.779,53.467 138.684,55.372 138.684,88.011 145.415,94.742 147.193,94.742 150.622,98.171 v1(150.622,100.965)
NetU_36: pad.X5 U.36 | length 91.6
  Top Layer w0.15: U.36 145.506,110.653 146.05,110.109 146.558,110.109 147.066,109.601 147.32,109.601 151.384,105.537 151.384,104.788 151.424,104.748 151.424,104.307 v1@151.384,104.267
  Bottom Layer w0.15: v1(129.794,36.703) 129.921,36.83 129.921,40.005 131.064,41.148 138.303,41.148 141.478,44.323 141.478,85.344 151.638,95.504 v1(151.638,104.14)
NetU_37: pad.X6 U.37 | length 104.2
  Top Layer w0.15: U.37 145.768,111.153 146.177,110.744 146.621,110.744 147.13,110.236 147.701,110.236 148.336,109.601 149.352,109.601 v1(152.146,106.807)
  Bottom Layer w0.15: v1(129.667,26.67) 129.667,29.757 132.295,32.385 138.684,32.385 144.272,37.973 144.272,82.423 153.354,91.505 153.354,91.629 153.289,91.694 153.289,105.537 152.146,106.68 v1(152.146,106.807)
NetU_38: pad.X7 U.38 | length 118.2
  Top Layer w0.15: U.38 146.284,111.653 147.066,110.871 147.955,110.871 148.463,110.363 149.733,110.363 151.892,108.204 153.67,108.204 v1(154.178,107.696)
  Bottom Layer w0.15: v1(129.794,16.637) 129.794,20.32 131.318,21.844 138.303,21.844 143.256,26.797 143.295,26.797 143.383,26.885 143.383,26.924 146.812,30.353 146.812,80.645 155.448,89.281 155.448,106.426 v1(154.178,107.696)
NetU_53: U.53
NetU_61: pad.Y6 U.61 | length 106
  Top Layer w0.15: pad.Y6 41.148,121.412 41.148,126.365 42.799,128.016 128.905,128.016 136.053,120.868 U.61
NetU_62: pad.Y7 U.62 | length 120.1
  Top Layer w0.15: pad.Y7 31.496,120.65 31.496,118.237 33.02,116.713 44.958,116.713 46.355,118.11 46.355,124.841 47.752,126.238 127,126.238 132.461,120.777 135.382,120.777 135.553,120.606 U.62
VCC: C1.1 C4.1 C5.1 C6.1 CbpOUT.1 L1.2 LDO.5 LED.1 Rpull.1 SWD.1 U.21 U.34 U.48 U.56 | length 220
  Top Layer w0.15: L1.2 117.249,105.89 128.27,94.869 136.017,94.869 136.525,95.377 136.525,98.144 136.613,98.232 ; v1@136.017,128.651 137.16,128.651 137.795,129.286 SWD.1 ; U.21 136.525,107.205 136.525,102.997 ; U.56 138.553,122.424 141.224,125.095 v1(145.923,125.095) ; C4.1 136.525,100.203 ; C5.1 136.525,102.997 ; U.34 145.236,109.653 145.669,109.22 145.669,105.283 ; U.48 148.269,116.653 149.606,115.316 150.495,115.316 ; C1.1@145.415,103.529 C1.1@145.669,103.275 ; C6.1 145.808,103.136 C1.1@145.669,103.275 ; v1(152.209,115.379) 152.146,115.316 150.495,115.316 ; Rpull.1 168.148,101.6 167.005,102.743 167.005,107.596 167.093,107.684 CbpOUT.1 ; LDO.5 168.336,109.982 ; LED.1@171.831,117.094 LED.1 171.704,110.871 170.815,109.982 168.336,109.982 ; v1(172.466,108.712) 171.438,107.684 CbpOUT.1 ; 136.525,100.203 136.525,102.997 ; 136.525,100.203 136.525,98.32 136.613,98.232 ; 136.613,98.232 148.905,98.232 ; C1.1@145.669,103.275 145.669,105.283 ; 145.669,105.283 148.883,105.283 148.971,105.195 148.971,98.298 148.905,98.232 ; 148.905,98.232 148.971,98.232 156.398,98.232 157.861,99.695 157.861,108.331 156.845,109.347 152.527,109.347 150.495,111.379 150.495,115.316 ; 168.336,109.982 168.402,109.916 CbpOUT.1
  Bottom Layer w0.15: v1(135.763,128.651) 135.763,127.254 136.017,127 145.415,127 145.796,126.619 145.796,125.222 v1(145.923,125.095) 145.923,121.158 147.32,119.761 150.368,119.761 152.273,117.856 152.273,115.443 v1(152.209,115.379) 155.766,115.379 156.464,114.681 v1(158.75,114.681) 171.577,114.681 172.339,113.919 172.339,108.839 v1(172.466,108.712)
pads on no net: LDO.4 P. P.4 P.6 P.7 P.8 P.9 SWD.6 SWD.7 SWD.8 SWD.9 U.5 U.6 U.9 U.10 U.11 U.12 U.23 U.24 U.25 U.26 U.27 U.28 U.29 U.30 U.31 U.32 U.39 U.40 U.41 U.42 U.43 U.44 U.49 U.50 U.51 U.59 U.60 U.63 U.64

## Polygon pours and split planes (outlines as drawn)
no net on Top Overlay "NONET_L-01_P-001" (solid): 129.032,142.875
GND on Top Layer "GND_L01_P008" (solid, remove dead copper, pour order 8): 122.555,130.302 125.476,133.223 125.476,141.097 128.016,143.637 172.593,143.637 175.133,141.097 175.133,98.044 172.339,95.25 165.481,95.25 148.336,78.105 148.336,15.113 145.542,12.319 127.635,12.319 125.222,14.732 125.222,92.456 119.888,97.79 112.776,97.79 102.87,107.696 99.441,107.696 97.028,110.109 28.956,110.109 27.559,111.506 27.559,127.762 29.591,129.794 122.174,129.794 122.555,130.175
GND on Bottom Layer "GND_L02_P009" (solid, remove dead copper, pour order 9): 122.555,130.302 125.476,133.223 125.476,141.097 128.016,143.637 172.593,143.637 175.133,141.097 175.133,98.044 172.339,95.25 165.481,95.25 148.336,78.105 148.336,15.113 145.542,12.319 127.635,12.319 125.222,14.732 125.222,92.456 119.888,97.79 112.776,97.79 102.87,107.696 99.441,107.696 97.028,110.109 28.956,110.109 27.559,111.506 27.559,127.762 29.591,129.794 122.174,129.794 122.555,130.175

## Other copper
Top Layer:
  pour cut-out: 110.236,98.552

## Silkscreen, mask and mechanical layers (free items; w line width, h text height)
Top Overlay:
  lines w0.254: 175.768,141.097 175.768,141.732 173.228,144.272 127.508,144.272 124.333,141.097 124.333,133.223 121.793,130.683 29.083,130.683 26.797,128.397 26.797,110.617 28.448,108.966 96.393,108.966 96.774,108.966 98.806,106.934 102.616,106.934 112.649,96.901 113.792,96.901 119.507,96.901 124.714,91.694 124.714,13.716 127,11.43 146.05,11.43 149.733,15.113 149.733,77.851 163.576,91.694 166.497,94.615 172.593,94.615 175.768,97.79 175.768,141.415
  text "22nd Sep 2020" at 139.573,39.243 h1.52 r270
  text "Author: MSS" at 142.494,39.243 h1.52 r270
  text "SAMD21_8X8" at 145.288,39.243 h1.52 r270
Top Paste:
  lines w0.254: 111.633,95.377 114.681,92.329 172.72,92.329 176.149,95.758 176.149,142.113 173.482,144.78 113.284,144.78 111.633,143.129 111.633,140.208 111.633,95.377

## Text inside footprints (layer, text, board x,y; h text height)
LDO: Top Overlay "*" at 168.717,116.097 h1.27 r270; Mechanical 13 "*" at 167.625,115.087 h1.27 r270
SWD: Mechanical 1 "J1" at 139.9,133.033 h0.64